# EAGLE board ultrasonic_send (EAGLE 6.1)
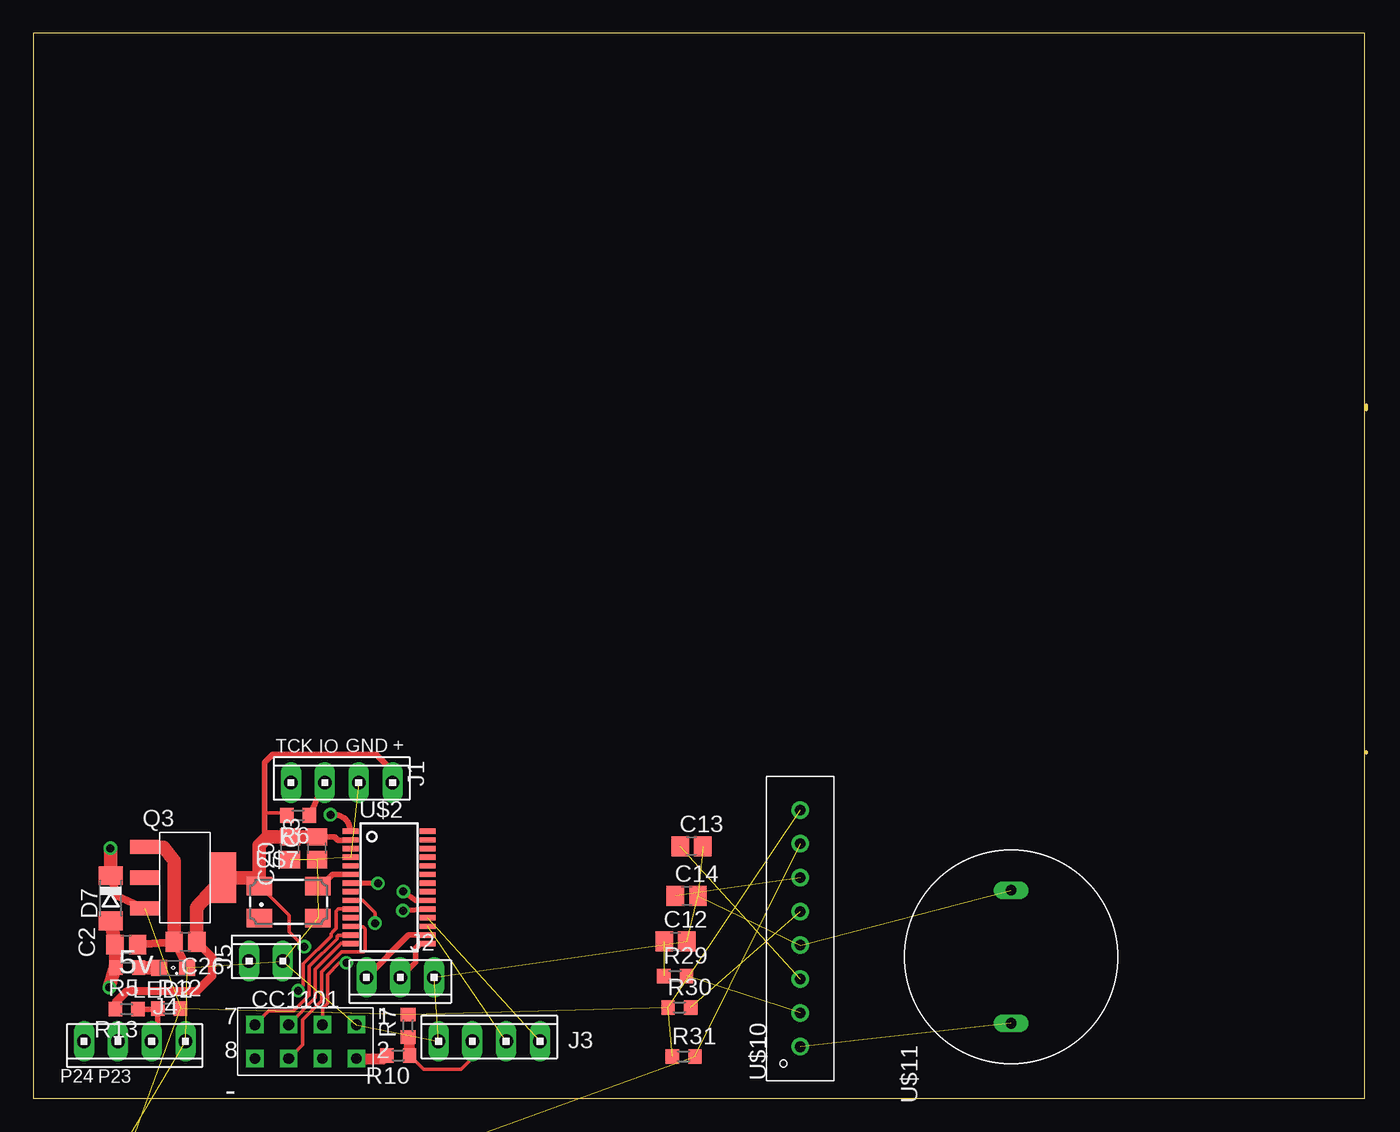
[diagram p0: board, top side]
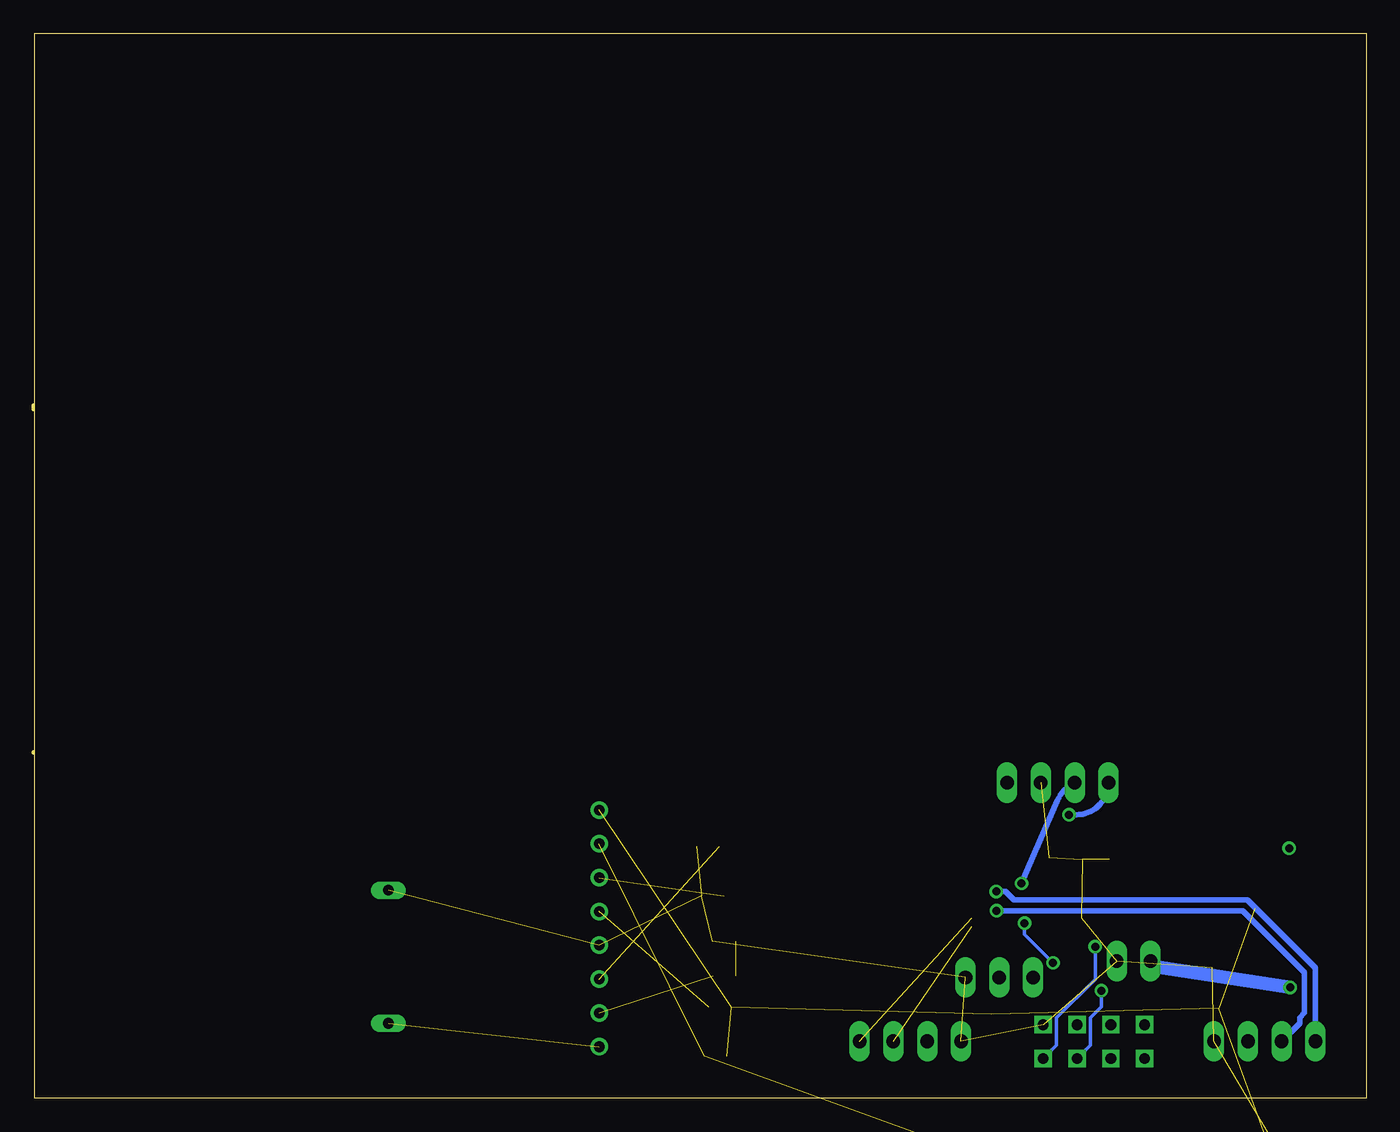
[diagram p1: board, bottom side, seen from below]

Size 100.1 x 80 mm. Coordinates in mm from the lower left corner, seen from the top.
Outline: 100.1,26.04 100.1,25.93
Outline: 100.1,51.74 100.1,52.07
Outline: 0,0 100,0 100,80 0,80 0,0
Copper layers (1*16): Top 0.035mm / dielectric 1.5mm / Bottom 0.035mm
Design rules: minimum track width 10mil, minimum drill 10mil, track to track 8mil, track to pad 8mil, pad to pad 8mil, via to via 8mil, smd to smd 8mil, copper to edge 40mil, drill to drill 8mil, minimum pad ring 10mil, minimum via ring 8mil, stop-mask expansion 4mil, vias tented up to drill 0.7mm, thermal gap 10mil

## Footprints (pad centres in the part's own frame; a part is rotated, then mirrored left to right if it is on the bottom)
C0805 = smd 1.3 x 1.5: 1 -0.85,0; 2 0.85,0
SOD80C = smd 1.4 x 1.8: A 1.7,0; C -1.7,0
10X04MTA = drill 1.016 long: 1 3.81,0; 2 1.27,0; 3 -1.27,0; 4 -3.81,0
10X03MTA = drill 1.016 long: 1 2.54,0; 2 0,0; 3 -2.54,0
10X02MTA = drill 1.016 long: 1 1.27,0; 2 -1.27,0
SML0805 = smd 1.2 x 1.2: A 1.05,0; C -1.05,0
SOT223-4 = smd 1.067 x 2.184: 1 -2.3,-3; 2 0,-3; 3 2.3,-3 | smd 3.81 x 1.93: 4 0,2.9
R0603 = smd 1 x 1.1: 1 -0.85,0; 2 0.85,0
PW_R-PDSO-G28 = smd 0.4 x 1.2: 1 -4.225,-2.9; 2 -3.575,-2.9; 3 -2.925,-2.9; 4 -2.275,-2.9; 5 -1.625,-2.9; 6 -0.975,-2.9; 7 -0.325,-2.9; 8 0.325,-2.9; 9 0.975,-2.9; 10 1.625,-2.9; 11 2.275,-2.9; 12 2.925,-2.9; 13 3.575,-2.9; 14 4.225,-2.9; 15 4.225,2.9; 16 3.575,2.9; 17 2.925,2.9; 18 2.275,2.9; 19 1.625,2.9; 20 0.975,2.9; 21 0.325,2.9; 22 -0.325,2.9; 23 -0.975,2.9; 24 -1.625,2.9; 25 -2.275,2.9; 26 -2.925,2.9; 27 -3.575,2.9; 28 -4.225,2.9
CC1101 = drill 0.8 square: CSN -2.54,0; GDO0 -2.54,-2.54; GDO2 2.54,0; GND -5.08,-2.54; MISO/GDO1 2.54,-2.54; MOSI 0,0; SCK 0,-2.54; VCC -5.08,0
CTS406 = smd 1.9 x 1.4: 1 -2.2,-1.2; 2 2.2,-1.2; 3 2.2,1.2; 4 -2.2,1.2
CX20106 = drill 0.8: P$1 -10.16,0; P$2 -7.62,0; P$3 -5.08,0; P$4 -2.54,0; P$5 0,0; P$6 2.54,0; P$7 5.08,0; P$8 7.62,0
ULTRASONIC = drill 0.8 long: P$1 -5,0; P$2 5,0

## Placement (x,y rotation side)
C2  10uF  [C0805]  6.99,11.56 0 top
C3  0.1uF  [C0805]  21.31,18.8 270 top
C12  1uF  [C0805]  48.23,11.79 0 top
C13  3.3uF  [C0805]  49.43,18.95 0 top
C14  330p  [C0805]  49.07,15.21 0 top
C20  0.1uF  [C0805]  19.28,18.8 270 top
C26  10uF  [C0805]  11.43,11.76 180 top
D7  PMLL4150  [SOD80C]  5.82,15.04 270 top
J1  SBWD  [10X04MTA]  23.16,23.72 0 top
J2  UART  [10X03MTA]  27.56,9.09 180 top
J3  AD  [10X04MTA]  34.24,4.29 0 top
J4  function  [10X04MTA]  7.62,4.29 180 top
J5  pwr_5V  [10X02MTA]  17.48,10.31 0 top
J6  AD  [10X04MTA]  5.31,-12.47 0 top  (outside the outline)
LED2  RED  [SML0805]  10.49,9.8 180 top
Q3  AMS1117-3.3  [SOT223-4]  11.38,16.59 270 top
R5  500R  [R0603]  7.06,9.83 180 top
R6  10K  [R0603]  19.89,21.26 180 top
R7  0  [R0603]  28.14,5.46 90 top
R10  0  [R0603]  27.41,3.23 180 top
R12  0  [R0603]  10.21,6.76 0 top
R13  0  [R0603]  7.01,6.71 180 top
R29  4.7K  [R0603]  48.21,9.19 0 top
R30  200K  [R0603]  48.51,6.83 0 top
R31  10K  [R0603]  48.84,3.15 0 top
U$2  MSP430F2112  [PW_R-PDSO-G28]  26.72,15.85 270 top
U$4  CC1101  [CC1101]  19.18,3 180 top
U$7  CRISTAL  [CTS406]  19.18,14.76 0 top
U$10  CX20106  [CX20106]  57.61,14.05 90 top
U$11  U_RX  [ULTRASONIC]  73.43,10.64 90 top

## Library data of the parts
C2 C3 C12-C14 C20 C26 R5-R7 R10 R12 R13 R29-R31 = resistor
D7 = diode
J1-J6 = con-amp
LED2 = led
Q3 = ti-parts
U$2 U$4 U$7 U$10 U$11 = tofu

## Nets
+3V3: C3.1 C20.1 C26.1 J1.1 Q3.4 R6.2 R10.2 R13.2 U$2.2 U$4.VCC U$7.4
+5V: C2.1 D7.A J5.2 R5.2
GND: C2.2 C3.2 C12.2 C13.2 C14.2 C20.2 C26.2 J1.2 J2.3 J3.4 J4.4 J5.1 J6.4 LED2.C Q3.1 U$2.4 U$4.GND U$7.2 U$10.P$4 U$11.P$2
N$5: J1.4 U$2.1
N$6: LED2.A R5.1
N$7: U$2.6 U$7.3
N$9: J4.3 R12.1 R13.1
N$10: J1.3 R6.1 U$2.7
N$11: U$2.9 U$4.GDO0
N$12: U$2.10 U$4.CSN
N$13: U$2.12 U$4.MOSI
N$14: U$2.13 U$4.MISO/GDO1
N$15: U$2.14 U$4.SCK
N$16: J2.1 U$2.16
N$17: J2.2 U$2.15
N$18: J3.1 U$2.18
N$19: J3.2 U$2.17
N$20: J3.3 R7.1 R10.1
N$42: J4.1 U$2.20
N$47: R29.2 U$10.P$2
N$48: C12.1 R29.1
N$49: U$10.P$1 U$11.P$1
N$50: C13.1 U$10.P$3
N$51: J6.2 R31.2 U$10.P$7
N$52: R30.2 U$10.P$5
N$53: C14.1 U$10.P$6
N$56: J4.2 U$2.19
OUT: Q3.2
VCC: D7.C J6.3 Q3.3 R7.2 R12.2 R30.1 R31.1 U$10.P$8

## Tracks (layer width: path | path; a pad name or v marks a point on that pad's centre or on a via)
+3V3  (via drill 0.6)
  Top 0.254: v20.34,11.4 19.23,12.52 19.23,13.74 17.35,15.62 U$7.4 | 17.37,21.44 18.69,21.44 R6.2
  Top 0.406: C3.1 22.62,19.65 22.89,19.38 23.78,19.38 U$2.2 | J1.1 26.98,24.59 25.73,25.83 17.98,25.83 17.37,25.22 17.37,21.44 17.37,19.86 17.6,19.63
  Top 0.61: R13.2 6.16,7.18 7.06,8.08 12.32,8.08 13.44,9.2 13.44,10.6 C26.1
  Top 0.813: U$4.VCC 26.33,3 R10.2
  Top 1.016: C26.1 12.27,14.35 Q3.4 16.35,16.59 U$7.4 16.98,19.01 17.6,19.63 19.27,19.63 C20.1 C3.1
  Bottom 0.254: v20.34,11.4 20.34,8.97 23.27,6.04 23.27,3.99 U$4.VCC
+5V  (via drill 0.6)
  Top 1.016: D7.A C2.1 R5.2 6.16,9.88 v5.71,8.33
  Bottom 1.016: v5.71,8.33 15.77,9.88 J5.2
GND  (16 unrouted)
  Top 0.61: C2.2 C26.2 LED2.C
  Top 1.016: Q3.1 9.78,18.87 10.57,17.86 C26.2
N$5  (via drill 0.6)
  Top 0.406: v22.33,21.31 22.59,21.31 arc-90 U$2.1
  Bottom 0.406: v22.33,21.31 21.77,21.31 arc-90 J1.4
N$6
  Top 1.016: R5.1 LED2.A
N$7
  Top 0.406: U$7.3 21.62,15.96 22.48,16.82 U$2.6
N$9
  Top 0.406: R13.1 9.31,6.71 R12.1 9.36,4.76 J4.3
N$10  (via drill 0.6)
  Top 0.406: R6.1 J1.3 | v25.88,16.15 U$2.7
  Bottom 0.406: v25.88,16.15 23.19,22.38 arc41 J1.3
N$11  (via drill 0.6)
  Top 0.254: v25.65,13.16 25.65,13.95 24.71,14.88 23.82,14.88 U$2.9 | v23.52,10.19 22.99,10.19 22.1,9.3 22.1,7.14 21.72,6.76 U$4.GDO0
  Bottom 0.254: v25.65,13.16 25.65,12.32 v23.52,10.19
N$12  (via drill 0.6)
  Top 0.254: v19.89,8.1 20.27,8.48 20.27,10.11 22.35,12.19 22.35,12.37 22.48,12.5 22.48,12.52 22.73,12.78 22.73,14.05 22.91,14.22 23.8,14.22 U$2.10
  Bottom 0.254: v19.89,8.1 19.89,6.88 20.73,6.04 20.73,3.99 U$4.CSN
N$13
  Top 0.254: U$2.12 24.51,12.93 24.54,12.9 24.77,12.9 24.92,12.75 24.92,11.15 24.79,11.02 23.16,11.02 21.64,9.5 21.64,7.34 20.22,5.92 20.22,4.04 U$4.MOSI
N$14
  Top 0.254: U$4.MISO/GDO1 17.68,6.58 19.56,6.58 20.73,7.75 20.73,9.91 22.81,11.99 22.81,12.17 22.91,12.27 23.8,12.27 U$2.13
N$15
  Top 0.254: U$2.14 23.8,11.63 23.11,11.63 21.18,9.7 21.18,7.54 U$4.SCK
N$16
  Top 0.406: U$2.16 28.2,12.28 J2.1
N$17
  Top 0.406: U$2.15 29.05,11.62 28.7,11.28 28.7,10.24 J2.2
N$18  (1 unrouted)
N$19  (1 unrouted)
N$20
  Top 0.254: J3.3 32.97,3.02 32.13,2.18 29.3,2.18 R10.1
  Top 0.813: R10.1 28.26,4.5 R7.1
N$42  (via drill 0.6)
  Top 0.406: U$2.20 28.7,14.88 v27.79,15.54
  Bottom 0.406: v27.79,15.54 27.1,15.54 26.47,14.91 8.91,14.91 3.83,9.83 3.83,4.32 J4.1
N$47  (1 unrouted)
N$48  (1 unrouted)
N$49  (1 unrouted)
N$50  (1 unrouted)
N$51  (2 unrouted)
N$52  (1 unrouted)
N$53  (1 unrouted)
N$56  (via drill 0.6)
  Top 0.406: U$2.19 v27.76,14.1
  Bottom 0.406: v27.76,14.1 9.27,14.1 4.65,9.47 4.65,6.43 5,6.07 5,5.64 J4.2
VCC  (via drill 0.6)  (6 unrouted)
  Top 0.61: D7.C 6.22,15.24 Q3.3
  Top 1.016: D7.C 5.82,18.77 v5.79,18.8

## Text on the board
tNames: + | TCK | IO | GND | 5v | P24 | P23 | -
_tNames: D7 | L2 | Q3 | D1 | C5 | J1 | R8 | U$3 | C7 | C3 | U$2 | C2 | C26 | R9 | R26 | U$7 | C4 | R5 | LED2 | C6 | R11 | R25 | C1 | C20 | Q1 | R24 | R1 | R3 | U$1 | J5 | R23 | LED4 | R21 | C15 | Q2 | J4 | R22 | R28 | R2 | R27 | C17 | R4 | U$12
_bNames: U$9